# Altium PCB WX0.012.615PCB-4.1.PcbDoc
Units mil, origin at the board's own origin, x right, y up, seen from the top; angles counter-clockwise.
Board outline 3592.04 x 3661.23 mil, 2 copper layers (Top Layer, Bottom Layer), stack 62.249 mil thick; 18 components, 0 nets, 32 pads, 0 vias.
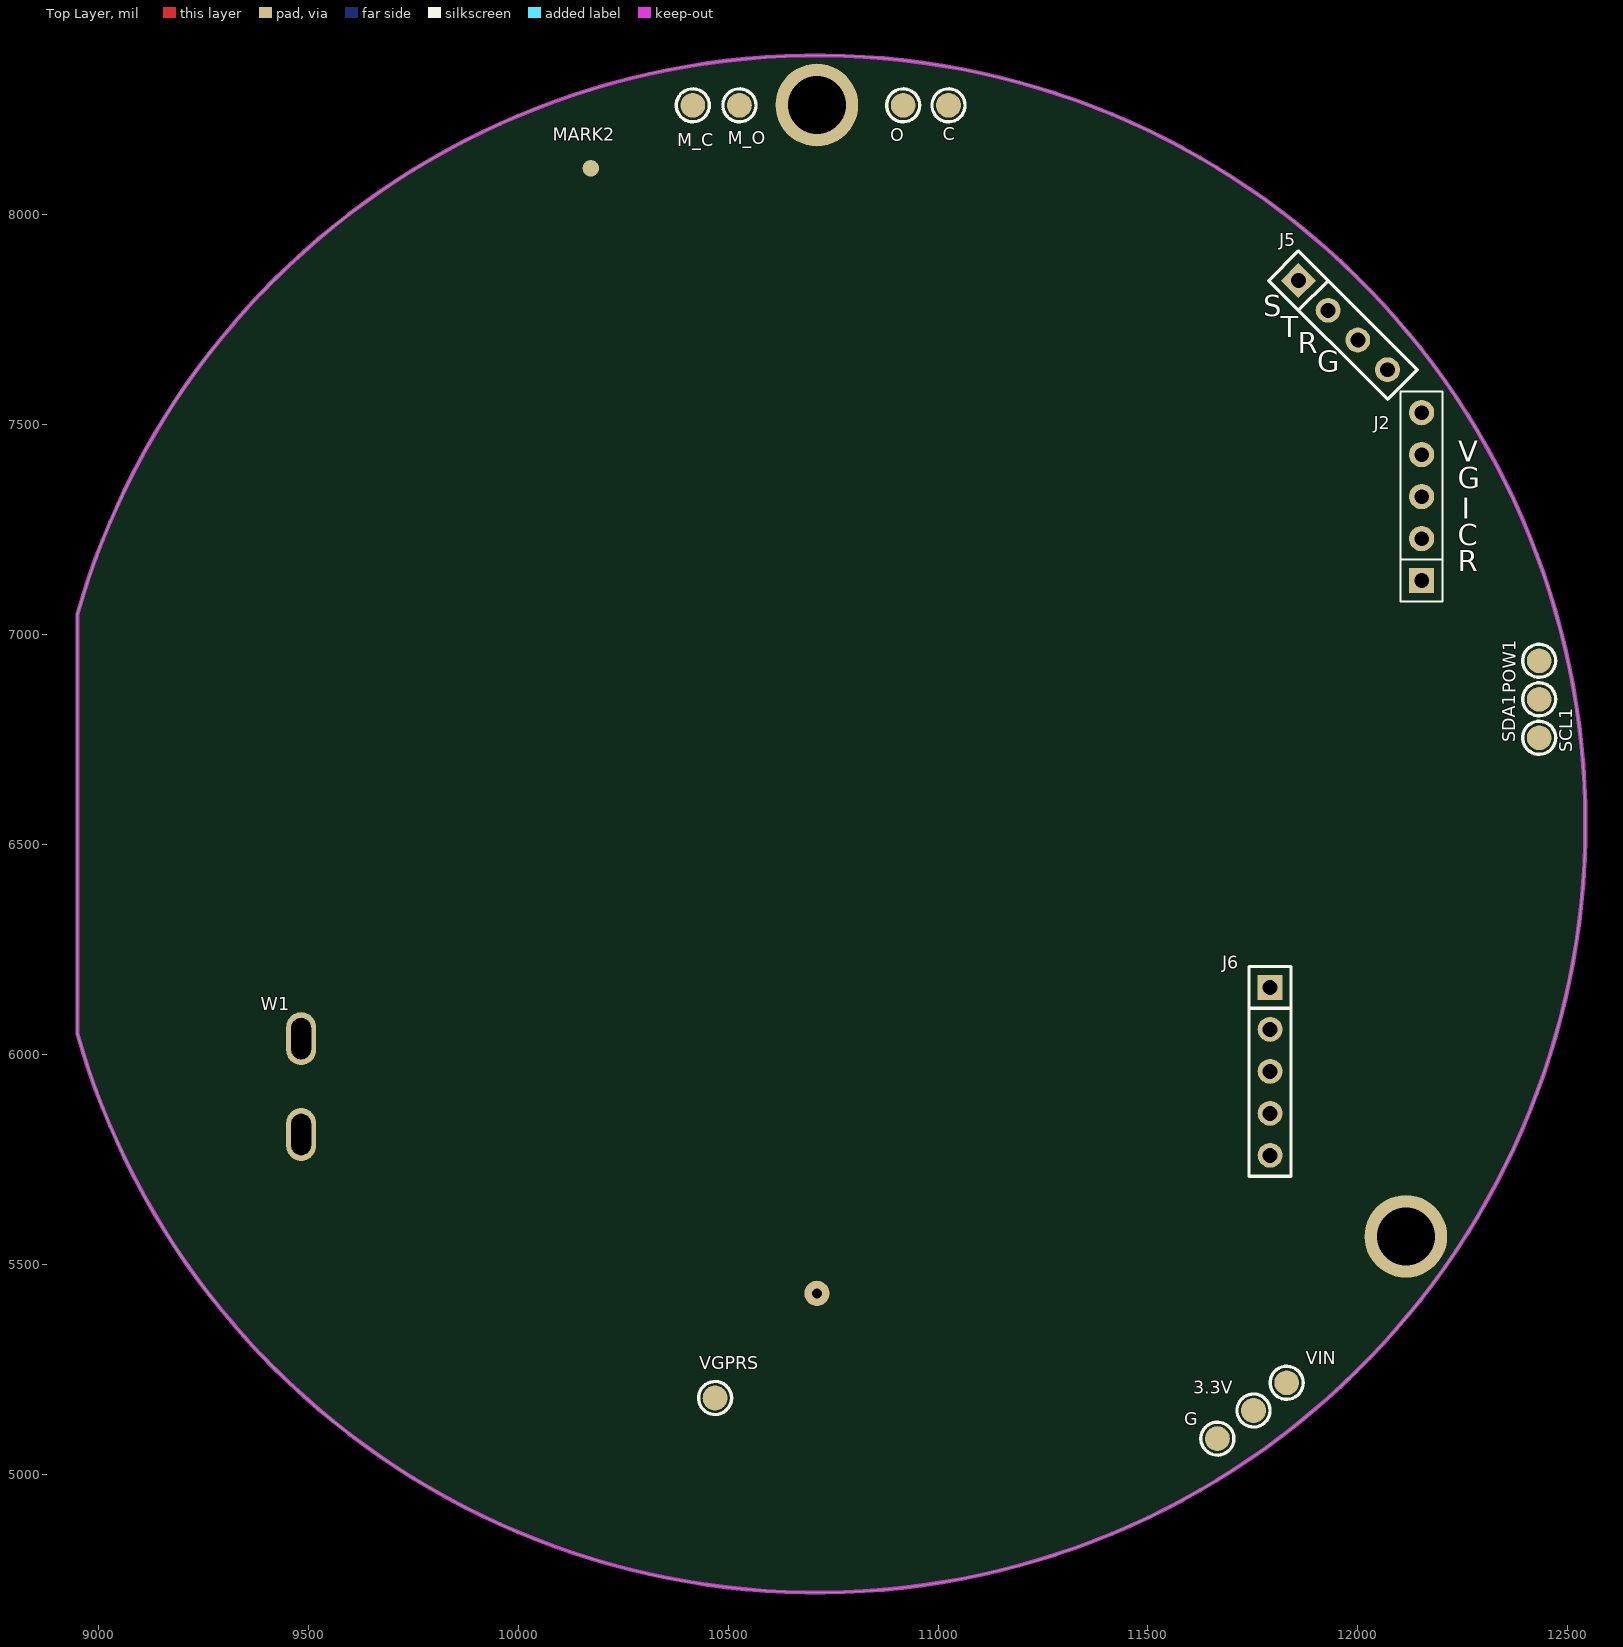
[diagram p0: Top Layer view]
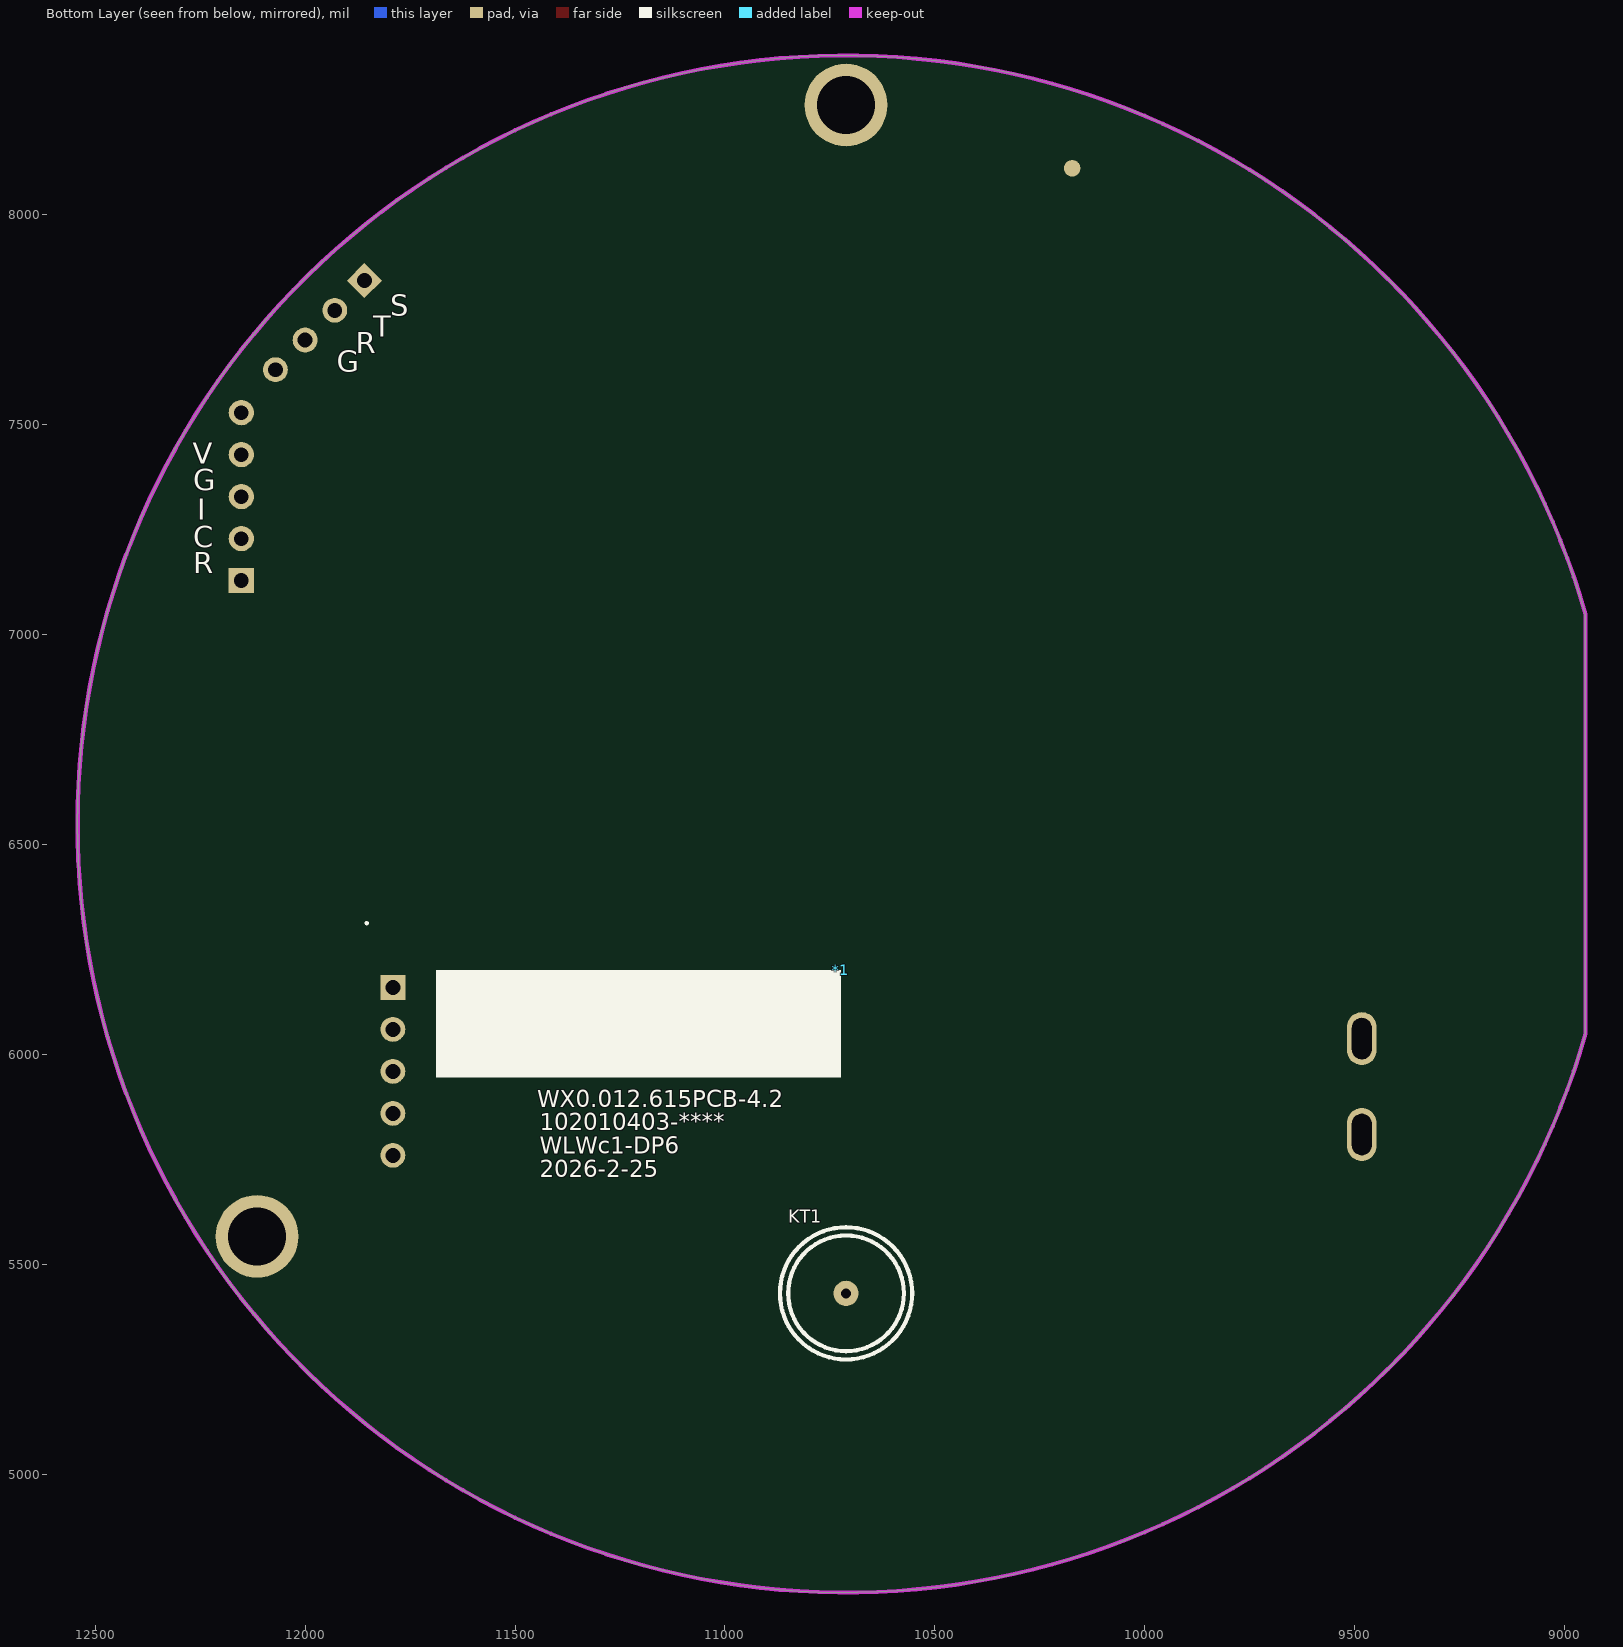
[diagram p1: Bottom Layer view, seen from below]

## Layer stack, top to bottom
Top Solder: solder mask 0.4, Solder Resist, Dk 3.5
Top Layer: signal copper 1.4
Dielectric 1: dielectric 59.4488, FR-4, Dk 4.8
Bottom Layer: signal copper 1.4
Bottom Solder: solder mask 0.4, Solder Resist, Dk 3.5

## Board outline
8950.25,6050.01 ccw(c10711.58,6549.23) 8950.25,7048.44

## Design rules (kind name [scope] priority, off if disabled: settings)
Clearance VIA-PAD-SAME [IsVia vs IsPad] p1: gap=15 ignorepadtopadclearanceinfootprint=FALSE except(0: Arc-Hole Track-Hole SMDPad-Via SMDPad-Hole THPad-Via THPad-Hole Via-Via Via-Hole Fill-Hole Poly-Hole Region-Hole Text-Hole)
Clearance VIA-VIA [ISVIA vs ISVIA] p2: gap=20 ignorepadtopadclearanceinfootprint=FALSE except(0: Arc-Hole Track-Hole SMDPad-Hole THPad-Hole Via-Hole Fill-Hole Poly-Hole Region-Hole Text-Hole)
Clearance VIA-PAD [ISVIA vs ISPAD] p3: gap=15 ignorepadtopadclearanceinfootprint=FALSE except(0: Arc-Hole Track-Hole SMDPad-Hole THPad-Hole Via-Hole Fill-Hole Poly-Hole Region-Hole Text-Hole)
Clearance VIA-TRACK [ISVIA vs ISTRACK] p4: gap=15 ignorepadtopadclearanceinfootprint=FALSE except(0: Arc-Hole Track-Hole SMDPad-Hole THPad-Hole Via-Hole Fill-Hole Poly-Hole Region-Hole Text-Hole)
Clearance Polygon [InPolygon] p5: gap=20 ignorepadtopadclearanceinfootprint=FALSE except(0: Arc-Hole Track-Hole SMDPad-Hole THPad-Hole Via-Hole Fill-Hole Poly-Hole Region-Hole Text-Hole)
Clearance [All] p6: gap=7 ignorepadtopadclearanceinfootprint=FALSE except(0: Arc-Hole Track-Hole SMDPad-Hole THPad-Hole Via-Hole Fill-Hole Poly-Hole Region-Hole Text-Hole)
ComponentClearance [All] p1 off: gap=10 collisioncheckmode=3 verticalgap=10 showdistances=FALSE
FabricationTestPointUsage TestPointUsage [All] p1: valid=0 allowmultiple=FALSE
FabricationTestpoint Testpoint [(IsPad And (OnTopLayer Or OnBottomLayer))] p1: side=3 testpointundercomponent=TRUE minsize=40 maxsize=100 preferedsize=60 minholesize=0 maxholesize=40 preferedholesize=32 testpointgrid=1 allowsidetop=TRUE allowsidebottom=TRUE usegrid=TRUE gridtolerance=0.01
HoleSize [All] p1 off: absolutevalues=TRUE maxlimit=300 minlimit=0 maxpercent=80.000 minpercent=20.000
HoleToHoleClearance [All] p1 off: gap=10 allowstackedmicrovias=TRUE
LayerPairs [All] p1 off: enforce=TRUE
MinimumSolderMaskSliver [All] p1 off: minsoldermaskwidth=10
NetAntennae [All] p1 off: netantennaetolerance=0
PlaneConnect "VIA_Direct Connect" [IsVia] p1: planeconnectstyle=Direct reliefexpansion=20 reliefentries=4 reliefconductorwidth=10 reliefairgap=10
PlaneConnect PIN_HEADER1 [HasFootprint ('PIN254*')] p2: planeconnectstyle=NoConnect reliefexpansion=20 reliefentries=4 reliefconductorwidth=10 reliefairgap=10
PlaneConnect [All] p3: planeconnectstyle=Relief reliefexpansion=20 reliefentries=4 reliefconductorwidth=10 reliefairgap=10
PolygonConnect PIN_HEADER [All vs HasFootprint ('PIN254*')] p1: connectstyle=NoConnect reliefconductorwidth=10 reliefentries=4 polygonreliefangle="90 Angle" airgapwidth=20
PolygonConnect "DIP_Square Button_DPDT" [HasFootprint('KEY')  Or  HasFootprint('KFT DIP-5.8X5.8') vs InNet('GND')] p2: connectstyle=NoConnect reliefconductorwidth=10 reliefentries=4 polygonreliefangle="90 Angle" airgapwidth=20
PolygonConnect SMD_ELECT_CAP [HasFootprint('CAPSM_178_660_780')  Or  HasFootprint('CAPSM_400_1000_1050') Or  HasFootprint('SMD_C 10*10.2') vs Net Like ('*GND*')] p3: connectstyle=Relief reliefconductorwidth=40 reliefentries=4 polygonreliefangle="90 Angle" airgapwidth=20
PolygonConnect [isvia] p4: connectstyle=Direct reliefconductorwidth=15 reliefentries=4 polygonreliefangle="90 Angle" airgapwidth=10
PolygonConnect PolygonConnect_1 [All] p5: connectstyle=Relief reliefconductorwidth=20 reliefentries=4 polygonreliefangle="90 Angle" airgapwidth=20
RoutingVias [All] p1: holewidth=10 width=20 viastyle="Through Hole" minholewidth=5 minwidth=5 maxholewidth=50 maxwidth=100
SilkToBoardRegionClearance [All] p1 off:
SilkToSilkClearance [All] p1 off: silktosilkclearance=10
SilkToSolderMaskClearance [IsPad] p1 off: minsilkscreentomaskgap=10 clearancetoexposedcopper=TRUE
SolderMaskExpansion [All] p1: expansion=4
Width [All] p1: maxlimit=300 minlimit=8 preferedwidth=8
18 further rules are at their usual default settings.

## Components (designator, comment, footprint, x,y, rotation, side; value= is the part's Value field where it differs from the comment)
3.3V "TEST-PAD" TEST-PAD 11751.49,5152.25 r90 top
*1 "Bar Code1" "Bar Code1" 10724,6201 r0 bottom locked
C "TEST-PAD" TEST-PAD 11025,8261 r90 top
G "TEST-PAD" TEST-PAD 11665.49,5085.25 r90 top
J2 "Header 5" PIN254_1*5SR 12152,7129 r90 top
J5 "XH254_4P" HDR1X4_2.54 11858.58,7843.42 r315 top
J6 "PIN254_1*5*WXHJ" PIN254_1*5*1100S 11791,6160 r270 top
KT1 "Touch" TOUCH-0.3-7-8 10711.57,5431.34 r180 bottom
M_C "TEST-PAD" TEST-PAD 10416,8261 r90 top
M_O "TEST-PAD" TEST-PAD 10527,8261 r90 top
MARK2 "MARK" MARK 10173,8111 r90 top
O "TEST-PAD" TEST-PAD 10917,8261 r90 top
POW1 "TEST-PAD" TEST-PAD 12432,6938 r90 top
SCL1 "TEST-PAD" TEST-PAD 12432,6754.5 r90 top
SDA1 "TEST-PAD" TEST-PAD 12432,6846.25 r90 top
VGPRS "TEST-PAD" TEST-PAD 10469,5182 r90 top
VIN "TEST-PAD" TEST-PAD 11830.49,5218.25 r90 top
W1 "天线" ANT-tanpian 9483,6038 r270 top

## Footprints (in the part's own frame and the unit in brackets; to place one, negate y for a bottom-side part, rotate by r counter-clockwise, add the part's x,y. Pads: shape width x height; smd on the part's side, far side on the other; paste and mask are expansions set on the pad)
ANT-tanpian [mm]
  oval 3.2x1.8 hole 1.2 slot 2.5 at 0 deg: 1(0,0) 2(5.8,0)
"Bar Code1" [mil]
  silkscreen extent 0,0 965,256
HDR1X4_2.54 [mm] "Connector; Header; 4 Position"
  rect 1.5x1.5 hole 0.9: 1(0,0)
  round 1.5 hole 0.9: 2(2.54,0) 3(5.08,0) 4(7.62,0)
  silkscreen extent -1.27,-1.27 8.89,1.27, body extent -1.3,-1.3 8.86,1.24, height 8.54
MARK [mm]
  round 1 smd: 0(0,0)
  round 1 smd far side: 1(0,0)
  Top Layer pour cut-out: -1.5,0 -1.386,-0.574 -1.061,-1.061 -0.574,-1.386 0,-1.5 0,-1.5 0.574,-1.386 1.061,-1.061 1.386,-0.574 1.5,0 1.5,0 1.386,0.574 1.061,1.061 0.574,1.386 0,1.5 0,1.5 -0.574,1.386 -1.061,1.061 -1.386,0.574 -1.5,0
  Bottom Layer pour cut-out: -1.5,0 -1.386,-0.574 -1.061,-1.061 -0.574,-1.386 0,-1.5 0,-1.5 0.574,-1.386 1.061,-1.061 1.386,-0.574 1.5,0 1.5,0 1.386,0.574 1.061,1.061 0.574,1.386 0,1.5 0,1.5 -0.574,1.386 -1.061,1.061 -1.386,0.574 -1.5,0
PIN254_1*5*1100S [mm]
  rect 1.5x1.5 hole 0.9: 1(0,0)
  round 1.5 hole 0.9: 2(2.54,0) 3(5.08,0) 4(7.62,0) 5(10.16,0)
  silkscreen extent -1.27,-1.27 11.43,1.27
PIN254_1*5SR [mil]
  rect 60x60 hole 35: 1(0,0)
  round 60 hole 35: 2(100,0) 3(200,0) 4(300,0) 5(400,0)
  silkscreen extent -50,-50 450,50
TEST-PAD [mm]
  round 1.5 smd: 1(0,0)
  silkscreen extent -1,-1 1,1
TOUCH-0.3-7-8 [mil]
  round 60 hole 23.62: 1(0,0)
  Multi-Layer pour cut-out: 0,-137.8 -52.73,-127.31 -97.44,-97.44 -127.31,-52.73 -137.8,0 -137.8,0 -127.31,52.73 -97.44,97.44 -52.73,127.31 0,137.8 0,137.8 52.73,127.31 97.44,97.44 127.31,52.73 137.8,0 137.8,0 127.31,-52.73 97.44,-97.44 52.73,-127.31 0,-137.8
  silkscreen extent -138,-138 138,138, body extent -138,-138 138,138, height 315

## Part data
3.3V C G M_C M_O O POW1 SCL1 SDA1 VGPRS VIN: library part AD_WXHJ_TEST-PAD_01, "单面焊盘测试点", Part Name=测试点, ID=23, Part Number=AD_WXHJ_TEST-PAD_01, SMD/DIP=SMD
*1: library part "AD_WXHJ_Bar Code_02", "条形码 ,填充，无需焊接器件", Part Name=条形码, ID=17, Part Number="AD_WXHJ_Bar Code_02", SMD/DIP=SMD
J2: "Header, 5-Pin"
J5: library part 90003, "单排插针，4PIN,间距2.54mm", Part Name=单排插针, ID=12, Part Number=90003
J6: library part AD_WXHJ_PinHeader_02, "1*5 ，Φ1.0 ，2.54mm，直脚,无需焊接器件", Part Name=排针, ID=17, Part Number=AD_WXHJ_PinHeader_02, SMD/DIP=DIP
KT1: library part 2, "长度>6，直径9mm", Part Name=按键, ID=2
MARK2: library part AD_WXHJ_MARK_01, "MARK点", ID=8, Part Name=MARK点, Part Number=AD_WXHJ_MARK_01, SMD/DIP=SMD
W1: library part 1010902-0145, "UB06000058A,3*3.1*1.25mm,公头,单排,IPEX一代板端", Part Name=IPEX座, ID=31, Part Number=1010902-0145, SMD/DIP=SMD

## Free pads (board coordinates)
  round 196.85 hole 137.8: 0(10711.57,8261.81) 0(12114.45,5566.93)

## Nets (pads, with @x,y where several pads share a name; then routed paths per layer and width w, separated by ;. In a path a pad name is that pad's centre, name@x,y a point inside that pad or via, vN(x,y) a via of type N, cw(c..) or ccw(c..) an arc to the next point about the centre after c; other vN are vias at no path point)
pads on no net: 3.3V.1 C.1 G.1 J2.1 J2.2 J2.3 J2.4 J2.5 J5.1 J5.2 J5.3 J5.4 J6.1 J6.2 J6.3 J6.4 J6.5 KT1.1 M_C.1 M_O.1 MARK2.0 MARK2.1 O.1 POW1.1 SCL1.1 SDA1.1 VGPRS.1 VIN.1 W1.1 W1.2

## Keep-outs
Keep-Out Layer:
  circle w10: c11978.59,5227.8 r0.12
  lines w10: 12541.25,6460 12541.25,6612 ; 8950.25,6050.01 ccw(c10711.58,6549.23) 8950.25,7048.44 8950.25,6050.01

## Silkscreen, mask and mechanical layers (free items; w line width, h text height)
Top Overlay:
  text "S" at 11775,7759 h50
  text "T" at 11816,7709 h50
  text "R" at 11857,7670 h50
  text "G" at 11903,7626 h50
  text "V" at 12239,7412 h50
  text "G" at 12238,7349 h50
  text "I" at 12248,7276 h50
  text "C" at 12238,7213 h50
  text "R" at 12238,7151 h50
Bottom Overlay:
  circle w10: c11853.31,6313.01 r0.12
  circle w10: c10711.57,5431.34 r157.48
  text "S" at 11797,7760 h50
  text "T" at 11838,7710 h50
  text "R" at 11879,7671 h50
  text "G" at 11925,7627 h50
  text "V" at 12268,7407 h50
  text "G" at 12267,7344 h50
  text "I" at 12257,7274 h50
  text "C" at 12267,7208 h50
  text "R" at 12267,7146 h50
  text "WX0.012.615PCB-4.2" at 11447,5874 h40
  text "102010403-****" at 11441,5820 h40
  text "WLWc1-DP6" at 11441,5764 h40
  text "2026-2-25" at 11441,5708 h40
Mechanical 5:
  circle w0.25: c8950.25,7048.44 r0.12
  circle w0.25: c9444.56,7870.65 r0.12
  circle w0.25: c9217.61,14207.89 r0.12
  circle w0.25: c11736.42,14207.89 r0.12
  circle w0.25: c11736.42,15823.77 r0.12
  circle w0.25: c11618.31,14311.63 r0.12
  circle w0.25: c11618.31,13288.01 r0.12
  circle w0.25: c13503.61,13288.01 r0.12
  circle w0.25: c9334.84,13288.01 r0.12
  circle w0.25: c6431.06,13524.23 r0.12
  circle w0.25: c5245.85,13524.23 r0.12
  circle w0.25: c6431.06,13524.23 r0.12
  circle w0.25: c10476.58,12406.35 r0.12
  circle w0.25: c5584.1,12406.35 r0.12
  circle w0.25: c10476.58,15236.82 r0.12
  circle w0.25: c14522.1,13524.23 r0.12
  circle w0.25: c14662.26,13524.23 r0.12
  circle w0.25: c14522.1,13524.23 r0.12
  circle w0.25: c11879.46,12541.92 r0.12
  circle w0.25: c14649.57,12541.92 r0.12
  circle w0.25: c9073.7,12541.92 r0.12
  circle w0.25: c11879.46,12541.92 r0.12
  circle w0.25: c11879.46,9886.05 r0.12
  circle w0.25: c11934.35,12500.29 r0.12
  circle w0.25: c11824.56,12583.55 r0.12
  circle w0.25: c11743.59,12202.8 r0.12
  circle w0.25: c9209.56,14845.65 r0.12
  circle w0.25: c8715.25,14023.44 r0.12
  circle w0.25: c12307.29,13524.23 r0.12
  circle w0.25: c12307.29,16458.23 r0.12
  circle w0.25: c10619.88,12302.19 r0.12
  circle w0.25: c10333.27,12510.52 r0.12